# Altium PCB omni robot main board v2.PcbDoc
Units mm, origin at the board's own origin, x right, y up, seen from the top; angles counter-clockwise.
Board outline 100 x 100 mm, 2 copper layers (Top Layer, Bottom Layer); 24 components, 65 nets, 190 pads, 10 vias.
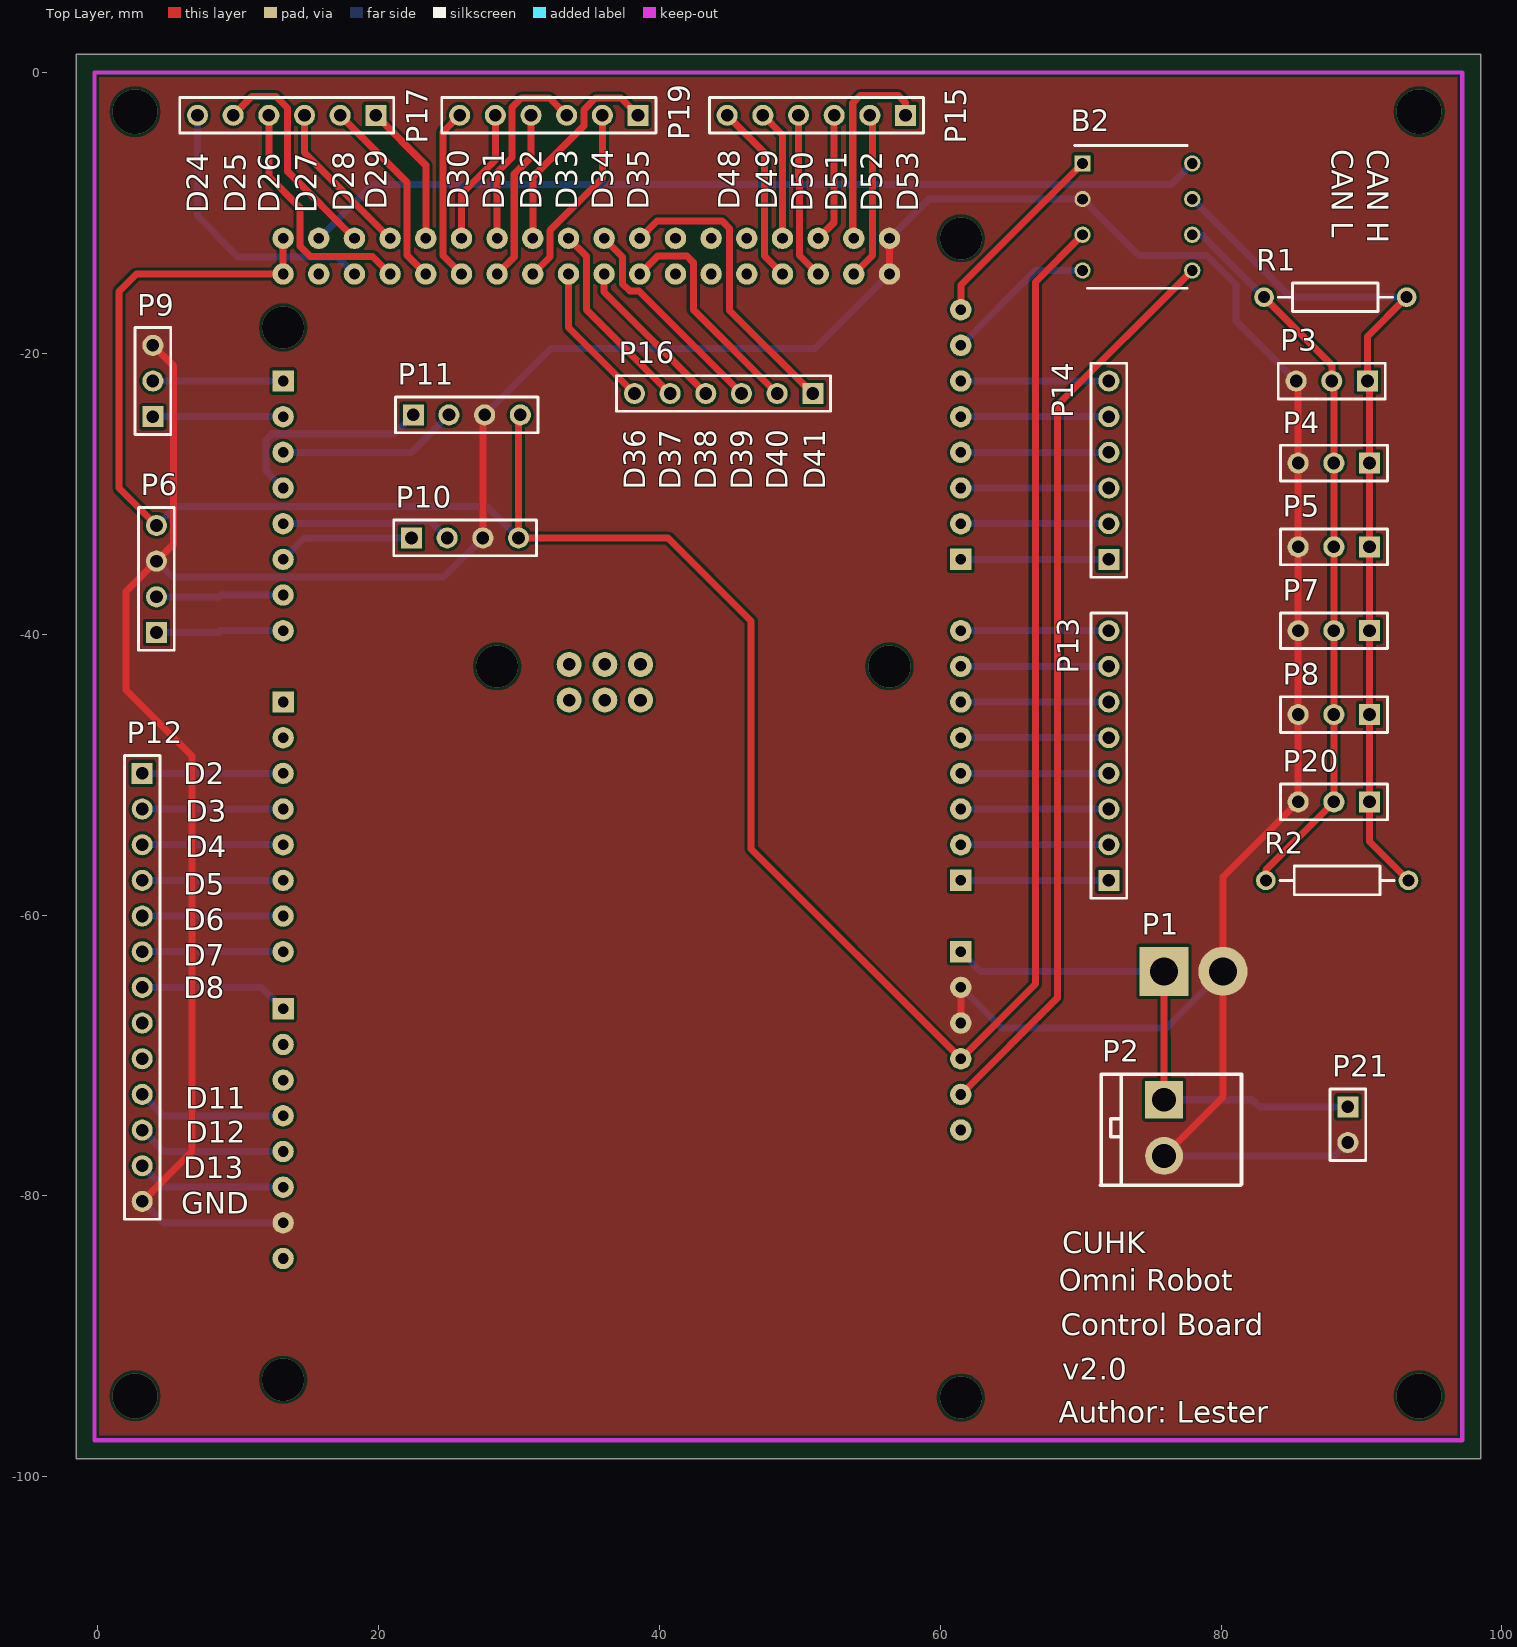
[diagram p0: Top Layer view]
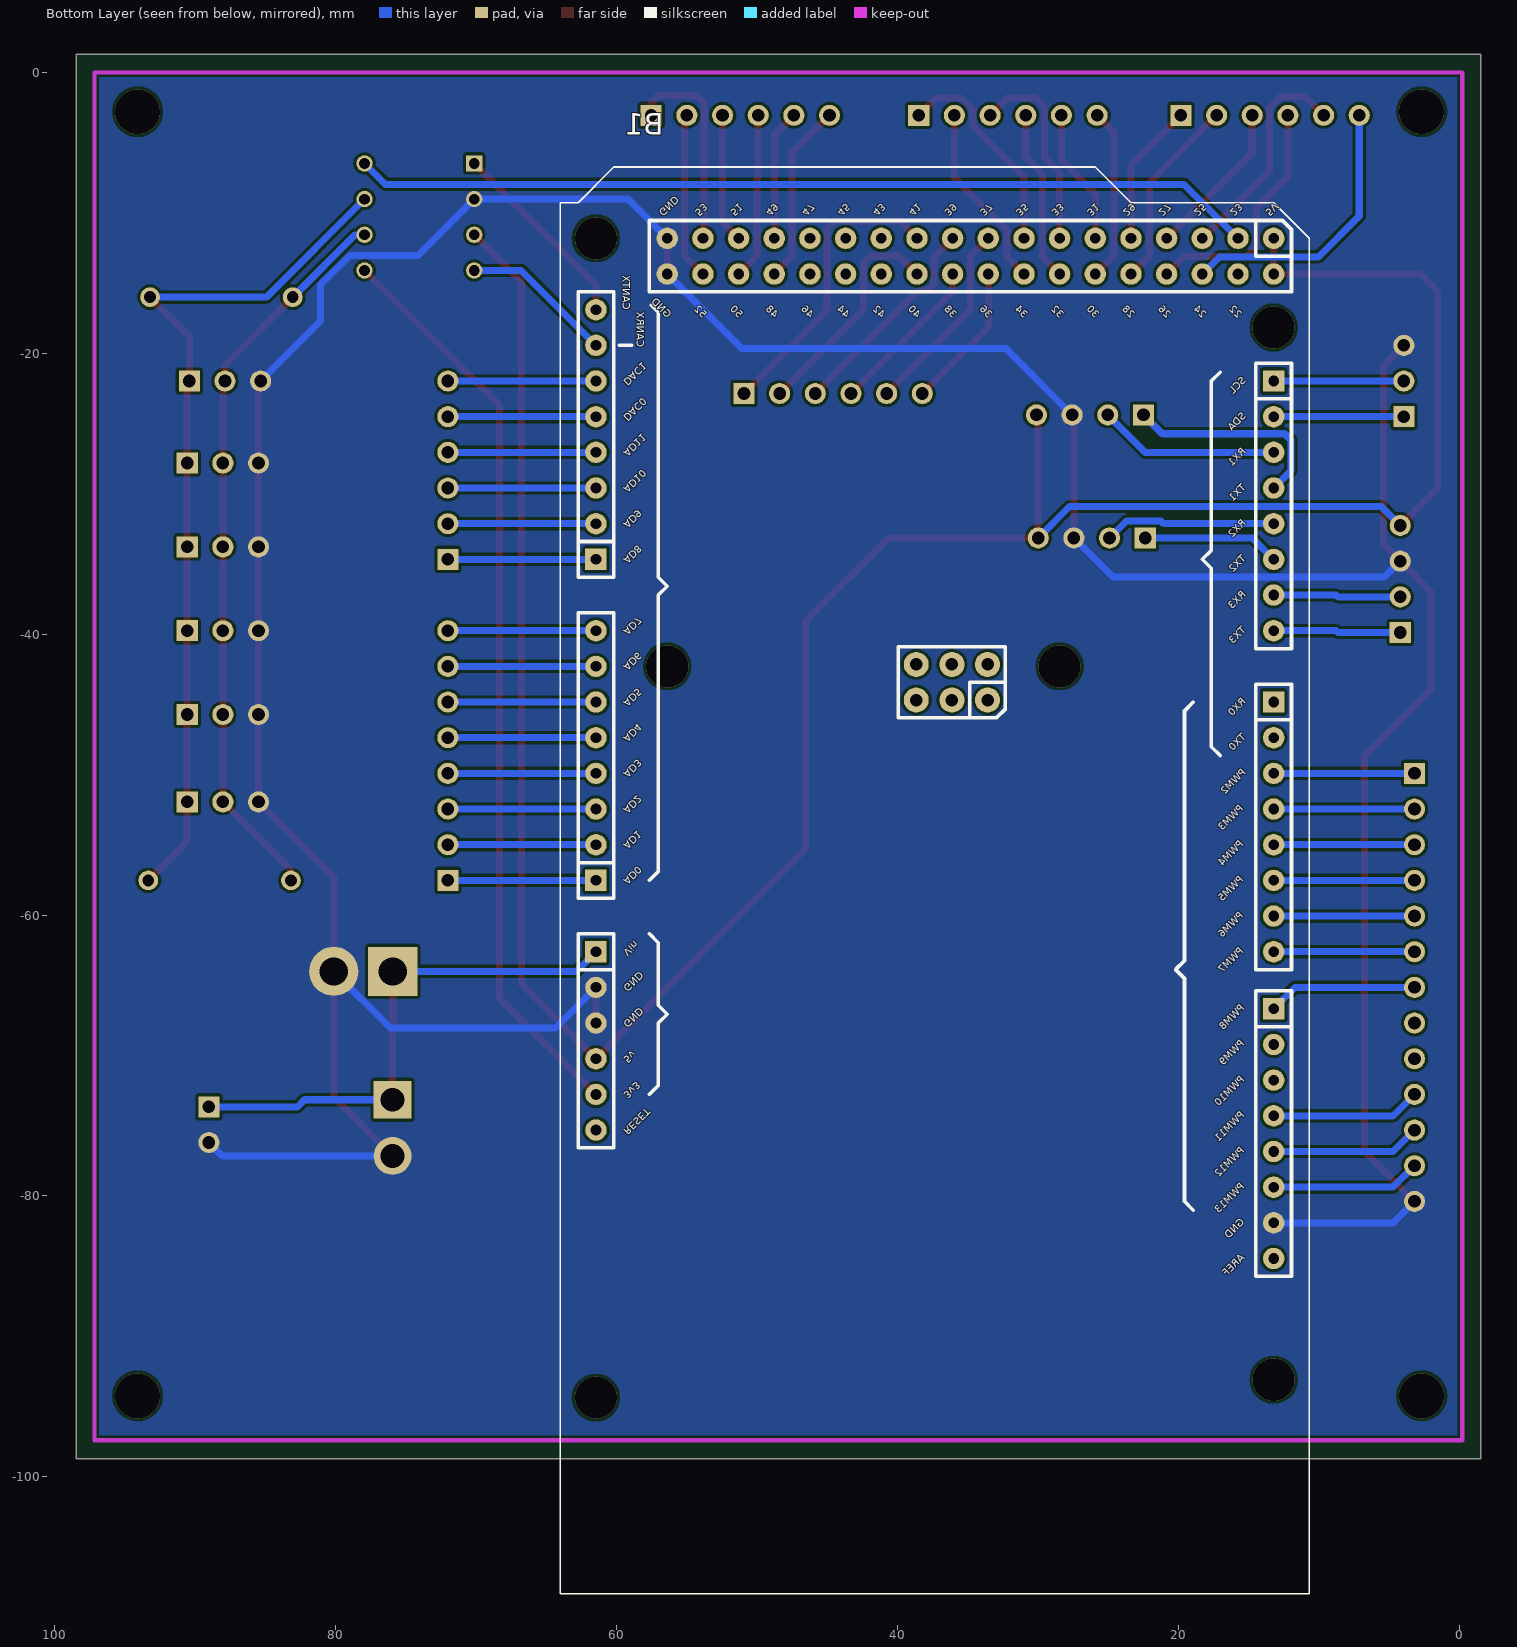
[diagram p1: Bottom Layer view, seen from below]

## Layer stack, top to bottom
Top Solder: solder mask 0.0102, Solder Resist, Dk 3.5
Top Layer: signal copper 0.0356
Dielectric 1: dielectric 0.32, FR-4, Dk 4.8
Bottom Layer: signal copper 0.0356
Bottom Solder: solder mask 0.0102, Solder Resist, Dk 3.5

## Board outline
-1.524,-98.7 98.476,-98.7 98.476,1.3 -1.524,1.3

## Design rules (kind name [scope] priority, off if disabled: settings)
Clearance [All] p1: gap=0.2 ignorepadtopadclearanceinfootprint=FALSE
PolygonConnect [All] p1: connectstyle=Direct reliefconductorwidth=0.254 reliefentries=4 polygonreliefangle="90 Angle" airgapwidth=0.254
RoutingVias [All] p1: holewidth=0.6 width=1 viastyle="Through Hole" minholewidth=0.711 minwidth=1.27 maxholewidth=0.711 maxwidth=1.27
SolderMaskExpansion [All] p1: expansion=0.102
Width [All] p1: maxlimit=4 minlimit=0.2 preferedwidth=0.5
30 further rules are at their usual default settings.

## Classes and differential pairs
component class "outgoing connection": B2 P1 P2 P3 P4 P5 P6 P7 P8 P9 P10 P11 P20 P21 R1 R2
component class "arduino due connection": B1 P12 P13 P14 P15 P16 P17 P19

## Components (designator, comment, footprint, x,y, rotation, side; value= is the part's Value field where it differs from the comment)
B1 "Arduino due" arduino_due_pinmap_v3 37.338,-48.133 r90 bottom
B2 "MCP2562-E_P" DIP781W56P254L950H533Q8N 74.041,-10.287 r0 top
P1 "5557 Connector" 5557_connector 75.937,-64.008 r0 top
P2 "big Pin power port" bigPin_power_port 75.946,-75.152 r0 top
P3 "Header 3" HDR1X3 90.424,-21.971 r180 top
P4 "Header 3" HDR1X3 90.572,-27.813 r180 top
P5 "Header 3" HDR1X3 90.572,-33.782 r180 top
P6 "HC06 Header" HDR1X4 4.191,-39.878 r90 top
P7 "Header 3" HDR1X3 90.572,-39.751 r180 top
P8 "Header 3" HDR1X3 90.572,-45.72 r180 top
P9 "Header 3" HDR1X3 3.937,-24.511 r90 top
P10 "HC06 Header" HDR1X4 22.352,-33.147 r0 top
P11 "HC06 Header" HDR1X4 22.479,-24.384 r0 top
P12 "Header 13" HDR1X13 3.175,-49.911 r270 top
P13 "Header 8" HDR1X8 72.009,-57.531 r90 top
P14 "Header 6" HDR1X6 72.009,-34.671 r90 top
P15 "Header 6" HDR1X6 57.531,-3.048 r180 top
P16 "Header 6" HDR1X6 50.927,-22.86 r180 top
P17 "Header 6" HDR1X6 19.812,-3.048 r180 top
P19 "Header 6" HDR1X6 38.481,-3.048 r180 top
P20 "Header 3" HDR1X3 90.572,-51.943 r180 top
P21 "Header 2" HDR1X2 89.027,-73.66 r270 top
R1 "Res2" AXIAL-0.4 88.138,-16.002 r180 top value=120
R2 "Res2" AXIAL-0.4 88.265,-57.531 r180 top value=120

## Footprints (in the part's own frame and the unit in brackets; to place one, negate y for a bottom-side part, rotate by r counter-clockwise, add the part's x,y. Pads: shape width x height; smd on the part's side, far side on the other; paste and mask are expansions set on the pad)
5557_connector [mm]
  rect 3.5x3.5 hole 2: 1(0,0)
  round 3.5 hole 2: 2(4.2,0)
arduino_due_pinmap_v3 [mil]
  rect 60x60 hole 30: 0(130,-950) 8(-730,-950) 21(1030,-950) 59(-570,950) 60(-370,950) 68(530,950)
  round 60 hole 30: 1(30,-950) 2(-70,-950) 3(-170,-950) 4(-270,-950) 5(-370,-950) 6(-470,-950) 7(-570,-950) 9(-830,-950) 10(-930,-950) 11(-1030,-950) 12(-1130,-950) 13(-1230,-950) 14(330,-950) 15(430,-950) 16(530,-950) 17(630,-950) 18(730,-950) 19(830,-950) 20(930,-950) 22(1330,-850) 23(1430,-850) 24(1330,-750) 25(1430,-750) 26(1330,-650) 27(1430,-650) 28(1330,-550) 29(1430,-550) 30(1330,-450) 31(1430,-450) 32(1330,-350) 33(1430,-350) 34(1330,-250) 35(1430,-250) 36(1330,-150) 37(1430,-150) 38(1330,-50) 39(1430,-50) 40(1330,50) 41(1430,50) 42(1330,150) 43(1430,150) 44(1330,250) 45(1430,250) 46(1330,350) 47(1430,350) 48(1330,450) 49(1430,450) 50(1330,550) 51(1430,550) 52(1330,650) 53(1430,650) 54(-1070,950) 55(-970,950) 56(-870,950) 57(-770,950) 58(-670,950) 61(-270,950) 62(-170,950) 63(-70,950) 64(30,950) 65(130,950) 66(230,950) 67(330,950) 69(630,950) 70(730,950) 71(830,950) 72(930,950) 73(1030,950) 74(1130,950) 75(1230,950) 76(-1330,-950) 77(-1430,-950) 78(1330,750) 79(1430,750) 80(1330,-950) 81(1430,-950)
  round 70 hole 35.43: 82(135.51,-148.03) 83(235.51,-148.03) 84(135.51,-48.03) 85(235.51,-48.03) 86(135.51,51.97) 87(235.51,51.97)
  silkscreen extent -2370,-1050 1630,1050
AXIAL-0.4 [mm] "Axial Device, Thru-Hole; 2 Leads; 0.4 in Pin Spacing"
  round 1.4 hole 0.85: 1(-5.08,0) 2(5.08,0)
  silkscreen extent -4.06,-1.02 4.06,1.02
bigPin_power_port [mm]
  rect 2.7x2.7 hole 1.7: 1(0,2)
  round 2.7 hole 1.7: 2(0,-2)
  silkscreen extent -4.54,-4.08 5.51,3.82
DIP781W56P254L950H533Q8N [mm]
  rect 1.159x1.159 / inner round 1.159 / far side rect 1.159x1.159 hole 0.759: 1(-3.905,3.81)
  round 1.159 hole 0.759: 2(-3.905,1.27) 3(-3.905,-1.27) 4(-3.905,-3.81) 5(3.905,-3.81) 6(3.905,-1.27) 7(3.905,1.27) 8(3.905,3.81)
  silkscreen extent -4.48,-5.08 3.56,5.08
HDR1X2 [mm] "Connector; Header; 2 Position"
  rect 1.5x1.5 hole 0.9: 1(0,0)
  round 1.5 hole 0.9: 2(2.54,0)
  silkscreen extent -1.27,-1.27 3.81,1.27
HDR1X3 [mm] "Connector; Header; 3 Position"
  rect 1.5x1.5 hole 0.9: 1(0,0)
  round 1.5 hole 0.9: 2(2.54,0) 3(5.08,0)
  silkscreen extent -1.27,-1.27 6.35,1.27
HDR1X4 [mm] "Connector; Header; 4 Position"
  rect 1.5x1.5 hole 0.9: 1(0,0)
  round 1.5 hole 0.9: 2(2.54,0) 3(5.08,0) 4(7.62,0)
  silkscreen extent -1.27,-1.27 8.89,1.27
HDR1X6 [mm] "Connector; Header; 6 Position"
  rect 1.5x1.5 hole 0.9: 1(0,0)
  round 1.5 hole 0.9: 2(2.54,0) 3(5.08,0) 4(7.62,0) 5(10.16,0) 6(12.7,0)
  silkscreen extent -1.27,-1.27 13.97,1.27
HDR1X8 [mm] "Connector; Header; 8 Position"
  rect 1.5x1.5 hole 0.9: 1(0,0)
  round 1.5 hole 0.9: 2(2.54,0) 3(5.08,0) 4(7.62,0) 5(10.16,0) 6(12.7,0) 7(15.24,0) 8(17.78,0)
  silkscreen extent -1.27,-1.27 19.05,1.27
HDR1X13 [mm] "Connector; Header; 13 Position"
  rect 1.5x1.5 hole 0.9: 1(0,0)
  round 1.5 hole 0.9: 2(2.54,0) 3(5.08,0) 4(7.62,0) 5(10.16,0) 6(12.7,0) 7(15.24,0) 8(17.78,0) 9(20.32,0) 10(22.86,0) 11(25.4,0) 12(27.94,0) 13(30.48,0)
  silkscreen extent -1.27,-1.27 31.75,1.27

## Part data
B1: library part "arduino due"
B2: "CAN Transceiver 1Mbps 5V 125degC PDIP8 Microchip MCP2562-E/P, CAN Transceiver 1-channel IEC 61000-4-2, 8-Pin PDIP", Manufacturer_Name=Microchip, Manufacturer_Part_Number=MCP2562-E/P, RS Part Number=7990225, Datasheet Link=http://uk.rs-online.com/webdocs/1380/0900766b81380aaf.pdf, Geometry.Height=5.334mm, Supplier_Name=RS
P1: library part 5557_connector
P3 P4 P5 P7 P8 P9 P20: "Header, 3-Pin", LatestRevisionDate=17-Jul-2002, LatestRevisionNote="Re-released for DXP Platform.", Publisher="Altium Limited"
P6 P10 P11: library part "Header 4", "Header, 4-Pin", LatestRevisionDate=17-Jul-2002, LatestRevisionNote="Re-released for DXP Platform.", Publisher="Altium Limited"
P12: "Header, 13-Pin", LatestRevisionDate=17-Jul-2002, LatestRevisionNote="Re-released for DXP Platform.", Publisher="Altium Limited"
P13: "Header, 8-Pin", LatestRevisionDate=17-Jul-2002, LatestRevisionNote="Re-released for DXP Platform.", Publisher="Altium Limited"
P14 P15 P16 P17 P19: "Header, 6-Pin", LatestRevisionDate=17-Jul-2002, LatestRevisionNote="Re-released for DXP Platform.", Publisher="Altium Limited"
P21: "Header, 2-Pin", LatestRevisionDate=17-Jul-2002, LatestRevisionNote="Re-released for DXP Platform.", Publisher="Altium Limited"
R1 R2: "Resistor", LatestRevisionDate=17-Jul-2002, LatestRevisionNote="Re-released for DXP Platform.", PackageDescription="Axial Device, Thru-Hole; 2 Leads; 0.4 in Pin Spacing", PackageReference=AXIAL-0.4, Published=8-Jun-2000, Publisher="Altium Limited"

## Via types
v1: diameter 3, hole 3, Top Layer to Bottom Layer, 6 vias
v2: diameter 3.2, hole 3.2, Top Layer to Bottom Layer, 4 vias

## Nets (pads, with @x,y where several pads share a name; then routed paths per layer and width w, separated by ;. In a path a pad name is that pad's centre, name@x,y a point inside that pad or via, vN(x,y) a via of type N, cw(c..) or ccw(c..) an arc to the next point about the centre after c; other vN are vias at no path point)
3.3v_due: B1.55 B2.5 | length 65.5
  Top Layer w0.5: B1.55 68.351,-65.888 68.351,-23.692 B2.5
5v_due: B1.56 B1.80 B1.81 B2.3 P6.4 P10.4 P11.4 | length 187.2
  Top Layer w0.5: P6.4 1.524,-29.591 1.524,-15.591 2.764,-14.351 B1.80 B1.81 ; P11.4 29.972,-24.511 P10.4 40.619,-33.147 46.537,-39.065 46.537,-55.3 B1.56 66.777,-64.922 66.777,-14.916 B2.3
  Bottom Layer w0.5: P6.4 5.542,-30.907 27.732,-30.907 P10.4
CAN_HIGH: B2.7 P3.1 P4.1 P5.1 P7.1 P8.1 P20.1 R1.1 R2.1 | length 62.1
  Top Layer w0.5: R1.1 90.424,-18.796 P3.1 90.572,-21.971 P4.1 P5.1 P7.1 P8.1 P20.1 90.572,-54.758 R2.1
  Bottom Layer w0.5: B2.7 84.931,-16.002 R1.1
CAN_LOW: B2.6 P3.2 P4.2 P5.2 P7.2 P8.2 P20.2 R1.2 R2.2 | length 52.6
  Top Layer w0.5: R1.2 87.884,-20.828 P3.2 88.032,-22.119 P4.2 P5.2 P7.2 P8.2 P20.2 83.185,-56.79 R2.2
  Bottom Layer w0.5: B2.6 78.613,-11.557 R1.2
CAN_STBY: B1.23 B2.8 | length 64.4
  Bottom Layer w0.5: B1.23 19.588,-7.971 76.452,-7.971 B2.8
CANBUS_RX: B1.74 B2.4 | length 10.9
  Bottom Layer w0.5: B1.74 66.802,-14.097 B2.4
CANBUS_TX: B1.75 B2.1 | length 14
  Top Layer w0.5: B1.75 61.468,-15.145 B2.1
due_RX1: B1.19 P11.2 | length 12.9
  Bottom Layer w0.5: B1.19 22.352,-27.051 P11.2
due_RX2: B1.17 P10.2 | length 12.3
  Bottom Layer w0.5: B1.17 21.052,-32.131 21.236,-31.947 23.692,-31.947 P10.2
due_RX3: B1.15 P6.2 | length 9.1
  Bottom Layer w0.5: P6.2 8.636,-37.338 8.763,-37.211 B1.15
due_SCL: B1.21 P9.2 | length 9.3
  Bottom Layer w0.5: P9.2 B1.21
due_SDA: B1.20 P9.1 | length 9.3
  Bottom Layer w0.5: P9.1 B1.20
due_TX1: B1.18 P11.1 | length 15.2
  Bottom Layer w0.5: B1.18 11.989,-28.372 11.989,-26.158 12.421,-25.726 21.137,-25.726 P11.1
due_TX2: B1.16 P10.1 | length 9.8
  Bottom Layer w0.5: B1.16 14.732,-33.147 P10.1
due_TX3: B1.14 P6.1 | length 9.1
  Bottom Layer w0.5: P6.1 8.636,-39.878 8.763,-39.751 B1.14
GND: B1.57 B1.58 B1.76 B1.78 B1.79 B2.2 P1.2 P2.2 P3.3 P4.3 P5.3 P6.3 P7.3 P8.3 P9.3 P10.3 P11.3 P12.13 P20.3 P21.2 | length 280
  Top Layer w0.5: P12.13 6.731,-76.835 6.731,-48.662 2.032,-43.963 2.032,-36.957 P6.3 5.391,-33.598 5.391,-20.885 P9.3 ; P10.3 27.432,-24.511 P11.3 ; B1.78 B1.79 ; B1.57 B1.58 ; P2.2 80.137,-72.961 P1.2 80.137,-57.298 P20.3 P8.3 P7.3 P5.3 P4.3 85.492,-22.119 P3.3
  Bottom Layer w0.5: P12.13 4.699,-81.915 B1.76 ; P6.3 5.33,-35.937 24.642,-35.937 P10.3 ; P11.3 32.288,-19.655 51.084,-19.655 B1.78 ; B1.79 59.182,-9.017 B2.2 74.145,-13.026 78.994,-13.026 81.077,-15.109 81.077,-17.704 P3.3 ; B1.58 64.359,-68.042 76.103,-68.042 P1.2 ; P2.2 88.075,-77.152 P21.2
NetB1_2: B1.2 P12.1 | length 10
  Bottom Layer w0.5: P12.1 B1.2
NetB1_3: B1.3 P12.2 | length 10
  Bottom Layer w0.5: P12.2 B1.3
NetB1_4: B1.4 P12.3 | length 10
  Bottom Layer w0.5: P12.3 B1.4
NetB1_5: B1.5 P12.4 | length 10
  Bottom Layer w0.5: P12.4 B1.5
NetB1_6: B1.6 P12.5 | length 10
  Bottom Layer w0.5: P12.5 B1.6
NetB1_7: B1.7 P12.6 | length 10
  Bottom Layer w0.5: P12.6 B1.7
NetB1_8: B1.8 P12.7 | length 10.7
  Bottom Layer w0.5: P12.7 11.684,-65.151 B1.8
NetB1_11: B1.11 P12.10 | length 10.7
  Bottom Layer w0.5: P12.10 4.699,-74.295 B1.11
NetB1_12: B1.12 P12.11 | length 10.7
  Bottom Layer w0.5: P12.11 4.699,-76.835 B1.12
NetB1_13: B1.13 P12.12 | length 10.7
  Bottom Layer w0.5: P12.12 4.699,-79.375 B1.13
NetB1_24: B1.24 P17.6 | length 20.1
  Bottom Layer w0.5: P17.6 7.112,-10.232 10.008,-13.127 17.064,-13.127 B1.24
NetB1_25: B1.25 P17.5 | length 16
  Top Layer w0.5: P17.5 10.977,-1.723 12.7,-1.723 13.513,-2.536 13.513,-7.036 B1.25
NetB1_26: B1.26 P17.4 | length 17.5
  Top Layer w0.5: P17.4 12.192,-7.412 14.427,-9.648 14.427,-12.391 15.138,-13.102 19.579,-13.102 B1.26
NetB1_27: B1.27 P17.3 | length 11.3
  Top Layer w0.5: P17.3 14.732,-5.715 B1.27
NetB1_28: B1.28 P17.2 | length 13.8
  Top Layer w0.5: P17.2 22.047,-7.823 22.047,-13.03 B1.28
NetB1_29: B1.29 P17.1 | length 10.2
  Top Layer w0.5: P17.1 23.368,-6.604 B1.29
NetB1_30: B1.30 P19.6 | length 12.3
  Top Layer w0.5: P19.6 24.587,-4.242 24.587,-13.03 B1.30
NetB1_31: B1.31 P19.5 | length 9.8
  Top Layer w0.5: B1.31 25.908,-8.657 28.321,-6.244 P19.5
NetB1_32: B1.32 P19.4 | length 12.3
  Top Layer w0.5: B1.32 29.667,-13.132 29.667,-7.229 30.861,-6.035 P19.4
NetB1_33: B1.33 P19.3 | length 14.4
  Top Layer w0.5: B1.33 28.448,-7.133 29.521,-6.06 29.521,-2.479 30.175,-1.824 32.177,-1.824 P19.3
NetB1_34: B1.34 P19.2 | length 13.4
  Top Layer w0.5: B1.34 32.207,-13.132 32.207,-11.237 35.941,-7.504 P19.2
NetB1_35: B1.35 P19.1 | length 15.4
  Top Layer w0.5: B1.35 30.988,-7.438 34.62,-3.806 34.62,-2.663 35.458,-1.824 37.257,-1.824 P19.1
NetB1_36: B1.36 P16.6 | length 10.5
  Top Layer w0.5: B1.36 33.528,-18.161 P16.6
NetB1_37: B1.37 P16.5 | length 14
  Top Layer w0.5: B1.37 34.798,-13.081 34.798,-16.891 P16.5
NetB1_38: B1.38 P16.4 | length 11.5
  Top Layer w0.5: B1.38 36.068,-15.621 P16.4
NetB1_39: B1.39 P16.3 | length 15.5
  Top Layer w0.5: B1.39 37.389,-13.132 37.389,-15.058 37.897,-15.566 38.553,-15.566 P16.3
NetB1_40: B1.40 P16.2 | length 16.3
  Top Layer w0.5: B1.40 39.882,-13.077 41.961,-13.077 42.418,-13.534 42.418,-16.891 P16.2
NetB1_41: B1.41 P16.1 | length 21.3
  Top Layer w0.5: B1.41 39.832,-10.587 44.475,-10.587 45.009,-11.121 45.009,-16.942 P16.1
NetB1_48: B1.48 P15.6 | length 12.9
  Top Layer w0.5: P15.6 47.498,-5.715 47.498,-13.081 B1.48
NetB1_49: B1.49 P15.5 | length 9.3
  Top Layer w0.5: P15.5 48.768,-4.445 B1.49
NetB1_50: B1.50 P15.4 | length 11.9
  Top Layer w0.5: P15.4 49.911,-7.412 49.987,-7.489 49.987,-13.03 B1.50
NetB1_51: B1.51 P15.3 | length 9.2
  Top Layer w0.5: B1.51 52.451,-10.668 P15.3
NetB1_52: B1.52 P15.2 | length 11.9
  Top Layer w0.5: B1.52 55.169,-13.03 55.169,-3.226 P15.2
NetB1_53: B1.53 P15.1 | length 14.7
  Top Layer w0.5: B1.53 53.772,-11.735 53.772,-2.18 54.301,-1.651 57.027,-1.651 57.531,-2.155 P15.1
NetB1_60: B1.60 P13.1 | length 10.5
  Bottom Layer w0.5: B1.60 P13.1
NetB1_61: B1.61 P13.2 | length 10.5
  Bottom Layer w0.5: B1.61 P13.2
NetB1_62: B1.62 P13.3 | length 10.5
  Bottom Layer w0.5: B1.62 P13.3
NetB1_63: B1.63 P13.4 | length 10.5
  Bottom Layer w0.5: B1.63 P13.4
NetB1_64: B1.64 P13.5 | length 10.5
  Bottom Layer w0.5: B1.64 P13.5
NetB1_65: B1.65 P13.6 | length 10.5
  Bottom Layer w0.5: B1.65 P13.6
NetB1_66: B1.66 P13.7 | length 10.5
  Bottom Layer w0.5: B1.66 P13.7
NetB1_67: B1.67 P13.8 | length 10.5
  Bottom Layer w0.5: B1.67 P13.8
NetB1_68: B1.68 P14.1 | length 10.5
  Bottom Layer w0.5: B1.68 P14.1
NetB1_69: B1.69 P14.2 | length 10.5
  Bottom Layer w0.5: B1.69 P14.2
NetB1_70: B1.70 P14.3 | length 10.5
  Bottom Layer w0.5: B1.70 P14.3
NetB1_71: B1.71 P14.4 | length 10.5
  Bottom Layer w0.5: B1.71 P14.4
NetB1_72: B1.72 P14.5 | length 10.5
  Bottom Layer w0.5: B1.72 P14.5
NetB1_73: B1.73 P14.6 | length 10.5
  Bottom Layer w0.5: B1.73 P14.6
V_RAW: B1.59 P1.1 P2.1 P21.1 | length 37.5
  Top Layer w0.5: P1.1 75.937,-68.592 75.946,-68.601 P2.1
  Bottom Layer w0.5: B1.59 62.865,-64.008 P1.1 ; P2.1 82.22,-73.152 82.728,-73.66 P21.1
pads on no net: B1.0 B1.1 B1.9 B1.10 B1.22 B1.42 B1.43 B1.44 B1.45 B1.46 B1.47 B1.54 B1.77 B1.82 B1.83 B1.84 B1.85 B1.86 B1.87 P12.8 P12.9
copper on no net:
  other v1: 61.468,-94.361 13.208,-93.091 28.448,-42.291 56.388,-42.291 13.208,-18.161 61.468,-11.811
  other v2: 2.667,-94.234 94.107,-94.234 2.667,-2.794 94.107,-2.794

## Polygon pours and split planes (outlines as drawn)
GND on Top Layer "Top Ground Trace" (solid, remove dead copper, pour order 0): -1.524,-98.7 98.476,-98.7 98.476,1.3 -1.524,1.3
GND on Bottom Layer "Bottom Ground Trace" (solid, remove dead copper, pour order 1): -1.524,-98.7 98.476,-98.7 98.476,1.3 -1.524,1.3

## Keep-outs
Keep-Out Layer:
  lines w0.3: -0.224,-97.4 -0.224,0 97.176,0 97.176,-97.4 -0.224,-97.4

## Silkscreen, mask and mechanical layers (free items; w line width, h text height)
Top Overlay:
  text "CAN L" at 87.884,-5.461 h1.52 r270
  text "CAN H" at 90.424,-5.461 h1.52 r270
  text "D29" at 20.574,-9.779 h1.52 r90
  text "D30" at 26.416,-9.779 h1.52 r90
  text "D31" at 28.956,-9.779 h1.52 r90
  text "D32" at 31.623,-9.779 h1.52 r90
  text "D33" at 34.163,-9.779 h1.52 r90
  text "D34" at 36.703,-9.779 h1.52 r90
  text "D35" at 39.243,-9.779 h1.52 r90
  text "D48" at 45.72,-9.779 h1.52 r90
  text "D49" at 48.387,-9.779 h1.52 r90
  text "D28" at 18.288,-9.906 h1.52 r90
  text "D50" at 50.927,-9.906 h1.52 r90
  text "D51" at 53.34,-9.906 h1.52 r90
  text "D52" at 55.88,-9.906 h1.52 r90
  text "D53" at 58.42,-9.906 h1.52 r90
  text "D24" at 7.874,-10.033 h1.52 r90
  text "D25" at 10.541,-10.033 h1.52 r90
  text "D26" at 12.954,-10.033 h1.52 r90
  text "D27" at 15.621,-10.033 h1.52 r90
  text "D36" at 38.989,-29.718 h1.52 r90
  text "D37" at 41.529,-29.718 h1.52 r90
  text "D38" at 44.069,-29.718 h1.52 r90
  text "D39" at 46.609,-29.718 h1.52 r90
  text "D40" at 49.149,-29.718 h1.52 r90
  text "D41" at 51.816,-29.718 h1.52 r90
  text "D2" at 6.096,-50.673 h1.52
  text "D3" at 6.223,-53.34 h1.52
  text "D4" at 6.223,-55.88 h1.52
  text "D5" at 6.096,-58.547 h1.52
  text "D6" at 6.096,-61.087 h1.52
  text "D7" at 6.096,-63.627 h1.52
  text "D8" at 6.096,-65.913 h1.52
  text "D11" at 6.223,-73.787 h1.52
  text "D12" at 6.223,-76.2 h1.52
  text "D13" at 6.096,-78.74 h1.52
  text "GND" at 5.969,-81.28 h1.52
  text "CUHK" at 68.707,-84.074 h1.52
  text "Omni Robot" at 68.453,-86.741 h1.52
  text "Control Board" at 68.58,-89.916 h1.52
  text "v2.0" at 68.707,-93.091 h1.52
  text "Author: Lester" at 68.453,-96.139 h1.52
Drill Drawing:
  text ".LEGEND" at 103.556,-93.62 h1.52
  text "Drill Drawing." at 103.556,-96.16 h1.52

## Dimensions
-0.224,-97.4 to -0.224,0 on Mechanical 1
-0.224,-97.4 to 97.176,-97.4 on Mechanical 1

## Text inside footprints (layer, text, board x,y; h text height)
B1: Bottom Overlay "RESET" at 59.563,-75.311 h0.51 r135; Bottom Overlay "3v3" at 59.563,-72.771 h0.51 r135; Bottom Overlay "5v" at 59.563,-70.231 h0.51 r135; Bottom Overlay "GND" at 59.563,-67.691 h0.51 r135; Bottom Overlay "GND" at 59.563,-65.151 h0.51 r135; Bottom Overlay "Vin" at 59.563,-62.611 h0.51 r135; Bottom Overlay "AD0" at 59.563,-57.531 h0.51 r135; Bottom Overlay "AD1" at 59.563,-54.991 h0.51 r135; Bottom Overlay "AD2" at 59.563,-52.451 h0.51 r135; Bottom Overlay "AD3" at 59.563,-49.911 h0.51 r135; Bottom Overlay "AD4" at 59.563,-47.371 h0.51 r135; Bottom Overlay "AD5" at 59.563,-44.831 h0.51 r135; Bottom Overlay "AD6" at 59.563,-42.291 h0.51 r135; Bottom Overlay "AD7" at 59.563,-39.751 h0.51 r135; Bottom Overlay "AD8" at 59.563,-34.671 h0.51 r135; Bottom Overlay "AD9" at 59.563,-32.131 h0.51 r135; Bottom Overlay "AD10" at 59.563,-29.591 h0.51 r135; Bottom Overlay "AD11" at 59.563,-27.051 h0.51 r135; Bottom Overlay "DAC0" at 59.563,-24.511 h0.51 r135; Bottom Overlay "DAC1" at 59.563,-21.971 h0.51 r135; Bottom Overlay "CANRX" at 58.547,-19.558 h0.51 r90; Bottom Overlay "CANTX" at 59.563,-16.891 h0.51 r90; Bottom Overlay "RX0" at 15.113,-44.831 h0.51 r315; Bottom Overlay "SCL" at 15.113,-21.971 h0.51 r315; Bottom Overlay "22" at 15.748,-17.526 h0.51 r45; Bottom Overlay "24" at 18.288,-17.526 h0.51 r45; Bottom Overlay "26" at 20.828,-17.526 h0.51 r45; Bottom Overlay "28" at 23.368,-17.526 h0.51 r45; Bottom Overlay "30" at 25.908,-17.526 h0.51 r45; Bottom Overlay "32" at 28.448,-17.526 h0.51 r45; Bottom Overlay "34" at 30.988,-17.526 h0.51 r45; Bottom Overlay "36" at 33.528,-17.526 h0.51 r45; Bottom Overlay "38" at 36.068,-17.526 h0.51 r45; Bottom Overlay "40" at 38.608,-17.526 h0.51 r45; Bottom Overlay "42" at 41.148,-17.526 h0.51 r45; Bottom Overlay "44" at 43.688,-17.526 h0.51 r45; Bottom Overlay "46" at 46.228,-17.526 h0.51 r45; Bottom Overlay "48" at 48.768,-17.526 h0.51 r45; Bottom Overlay "52" at 53.848,-17.526 h0.51 r45; Bottom Overlay "GND" at 56.388,-17.526 h0.51 r45; Bottom Overlay "50" at 51.308,-17.526 h0.51 r45; Bottom Overlay "5V" at 13.843,-9.906 h0.51 r135; Bottom Overlay "23" at 16.383,-9.906 h0.51 r135; Bottom Overlay "25" at 18.923,-9.906 h0.51 r135; Bottom Overlay "27" at 21.463,-9.906 h0.51 r135; Bottom Overlay "29" at 24.003,-9.906 h0.51 r135; Bottom Overlay "31" at 26.543,-9.906 h0.51 r135; Bottom Overlay "33" at 29.083,-9.906 h0.51 r135; Bottom Overlay "35" at 31.623,-9.906 h0.51 r135; Bottom Overlay "37" at 34.163,-9.906 h0.51 r135; Bottom Overlay "39" at 36.703,-9.906 h0.51 r135; Bottom Overlay "41" at 39.243,-9.906 h0.51 r135; Bottom Overlay "43" at 41.783,-9.906 h0.51 r135; Bottom Overlay "45" at 44.323,-9.906 h0.51 r135; Bottom Overlay "47" at 46.863,-9.906 h0.51 r135; Bottom Overlay "49" at 49.403,-9.906 h0.51 r135; Bottom Overlay "51" at 51.943,-9.906 h0.51 r135; Bottom Overlay "53" at 54.483,-9.906 h0.51 r135; Bottom Overlay "GND" at 57.023,-9.906 h0.51 r135; Bottom Overlay "SDA" at 15.113,-24.511 h0.51 r315; Bottom Overlay "RX1" at 15.113,-27.051 h0.51 r315; Bottom Overlay "TX1" at 15.113,-29.591 h0.51 r315; Bottom Overlay "RX2" at 15.113,-32.131 h0.51 r315; Bottom Overlay "TX2" at 15.113,-34.671 h0.51 r315; Bottom Overlay "RX3" at 15.113,-37.211 h0.51 r315; Bottom Overlay "TX3" at 15.113,-39.751 h0.51 r315; Bottom Overlay "TX0" at 15.113,-47.371 h0.51 r315; Bottom Overlay "PWM2" at 15.113,-49.911 h0.51 r315; Bottom Overlay "PWM3" at 15.293,-52.451 h0.51 r315; Bottom Overlay "PWM4" at 15.293,-54.991 h0.51 r315; Bottom Overlay "PWM5" at 15.293,-57.531 h0.51 r315; Bottom Overlay "PWM6" at 15.293,-60.071 h0.51 r315; Bottom Overlay "PWM7" at 15.293,-62.611 h0.51 r315; Bottom Overlay "PWM8" at 15.24,-66.675 h0.51 r315; Bottom Overlay "PWM9" at 15.24,-69.215 h0.51 r315; Bottom Overlay "PWM10" at 15.24,-71.755 h0.51 r315; Bottom Overlay "PWM11" at 15.24,-74.295 h0.51 r315; Bottom Overlay "PWM12" at 15.24,-76.835 h0.51 r315; Bottom Overlay "PWM13" at 15.24,-79.375 h0.51 r315; Bottom Overlay "GND" at 15.24,-81.915 h0.51 r315; Bottom Overlay "AREF" at 15.24,-84.455 h0.51 r315